# EAGLE board heartSLOG (EAGLE 9.6.2)
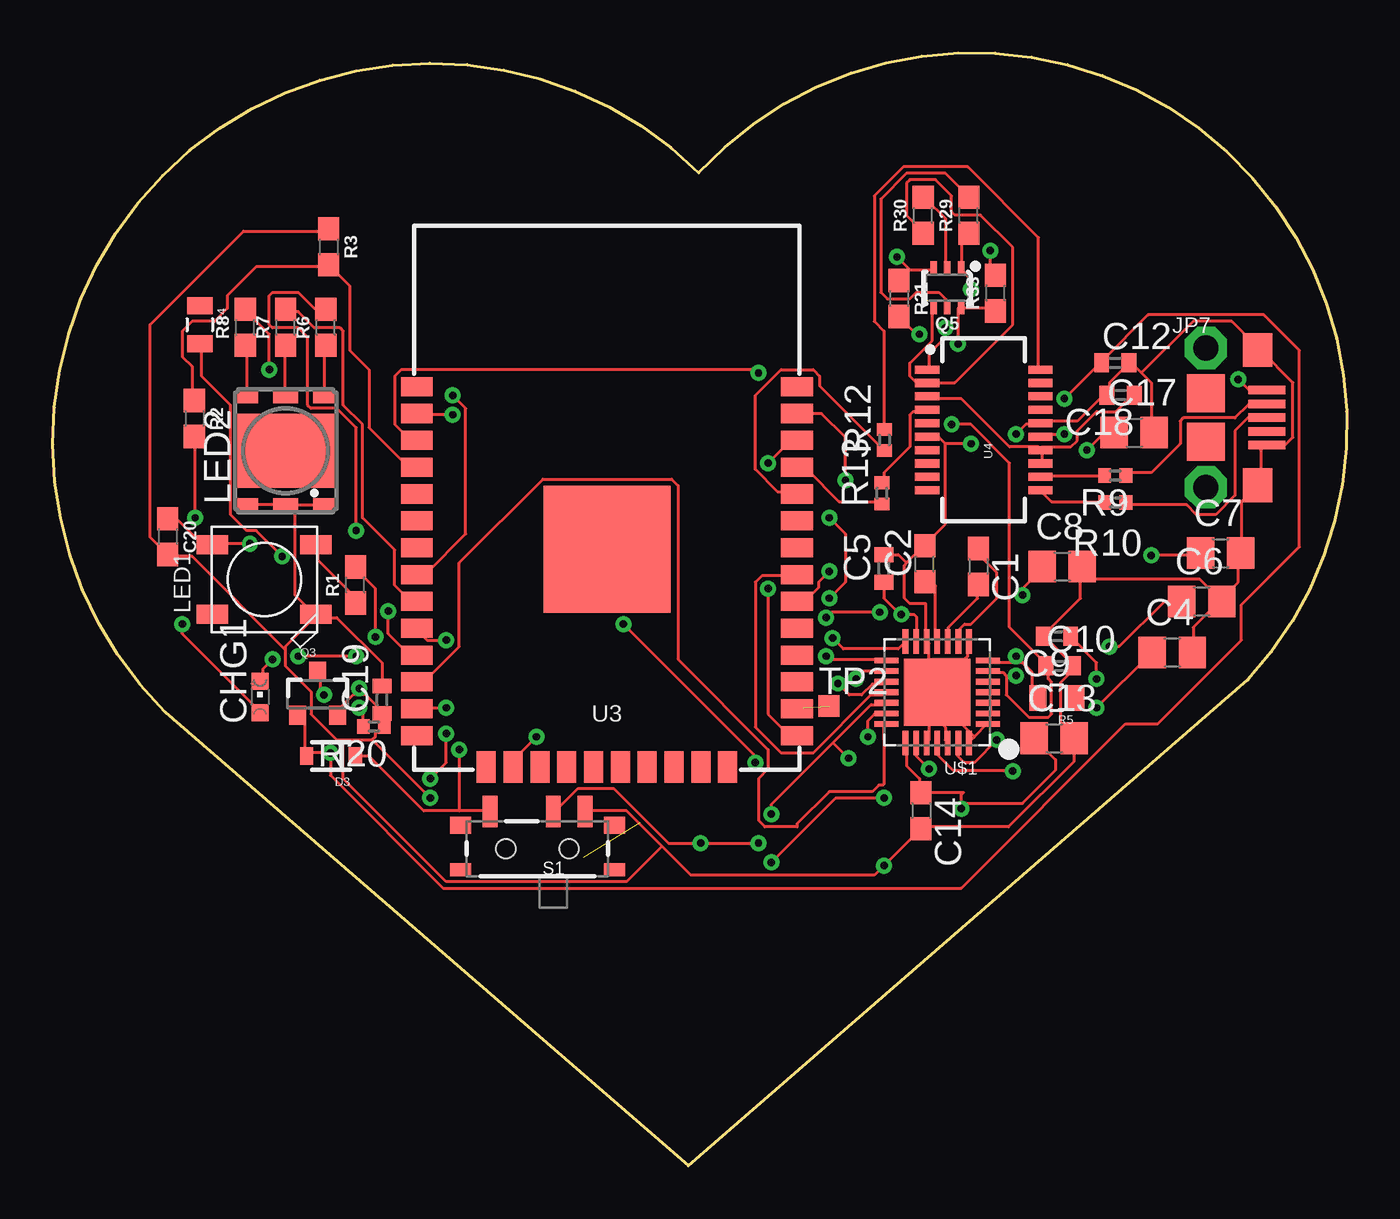
[diagram p0: board, top side]
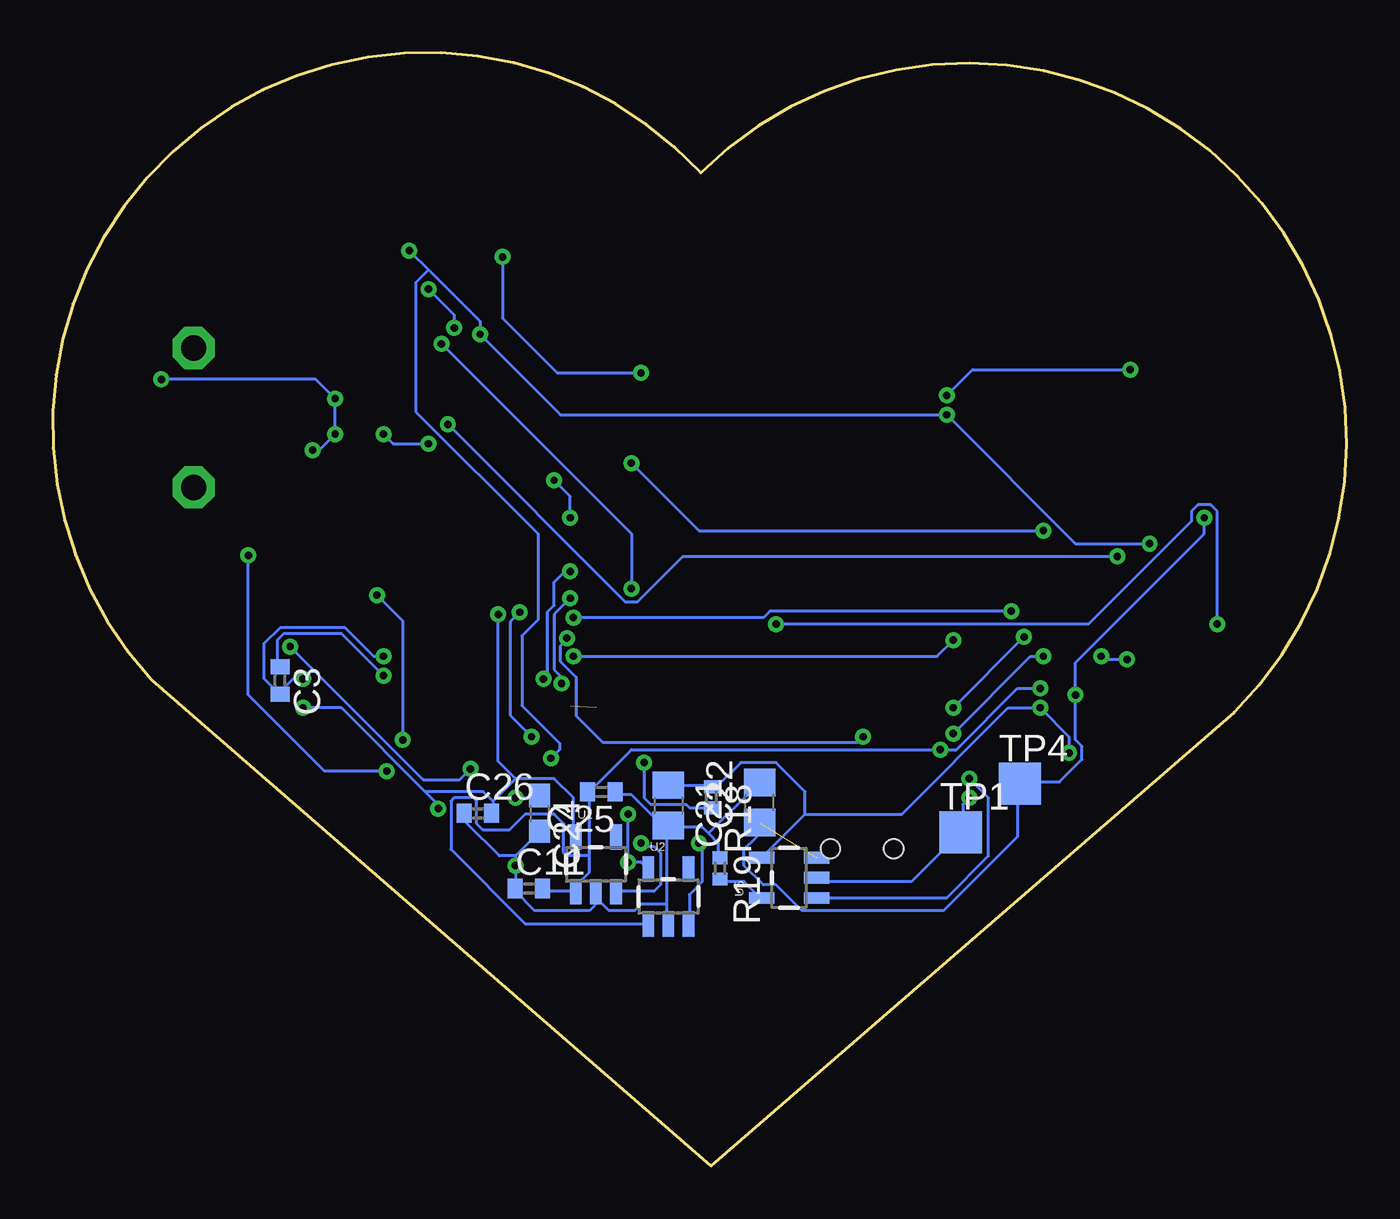
[diagram p1: board, bottom side, seen from below]

Size 61.26 x 52.68 mm. Coordinates in mm from the lower left corner, seen from the top.
Outline: 5.33,21.48 arc-180 30.58,47 arc-180 56.58,23 30.09,0 5.33,21.48
Copper layers (1*16): Top 0.035mm / dielectric 1.5mm / Bottom 0.035mm
Design rules "default": minimum track width 6mil, minimum drill 0.35mm, track to track 6mil, track to pad 6mil, pad to pad 6mil, via to via 6mil, smd to smd 6mil, copper to edge 40mil, drill to drill 6mil, minimum pad ring 10mil, minimum via ring 8mil, stop-mask expansion 4mil, vias tented up to drill 0mil, thermal gap 10mil

## Footprints (pad centres in the part's own frame; a part is rotated, then mirrored left to right if it is on the bottom)
C0603 = smd 1.1 x 1: 1 -0.85,0; 2 0.85,0
C0402 = smd 0.7 x 0.9: 1 -0.65,0; 2 0.65,0
C0805 = smd 1.3 x 1.5: 1 -0.95,0; 2 0.95,0
0603 = smd 1.1 x 1: 1 -0.85,0; 2 0.85,0
CHIPLED_0603 = smd 0.8 x 0.8: A 0,-0.75; C 0,0.75
SOD-323 = smd 0.63 x 0.83: A 1.15,0; C -1.15,0
MICRO-B = smd 0.4 x 1.75: 1 -1.25,2.975; 2 -0.6,2.975; 3 0.05,2.975; 4 0.7,2.975; 5 1.35,2.975 | smd 1.8 x 1.8: P$1 -1.1,0.1; P$2 1.2,0.1 | drill 1.2 pad 2 octagon: P$3 -3.25,0.1; P$4 3.35,0.1 | smd 1.6 x 1.4: P$5 -3.15,2.55; P$6 3.25,2.55
WS2812B = smd 1.5 x 0.9: 1-VDD 2.45,-1.65; 2-DOUT 2.45,1.65; 3-GND -2.45,1.65; 4-DIN -2.45,-1.65
F50360 = smd 0.6 x 1.05: BA 2.55,1.825; BC -2.55,1.825; RA 2.55,-1.825; RC -2.55,-1.825 | smd 0.6 x 1.2: GA 2.55,0; GC -2.55,0 | smd 3.5 x 4.7: NC 0,0
SOT23-3 = smd 0.8 x 0.9: 1 -0.95,-1; 2 0.95,-1; 3 0,1.1
SC70-6 = smd 0.3 x 0.66: 1 -0.65,-0.92; 2 0,-0.92; 3 0.65,-0.92; 4 0.65,0.92; 5 0,0.92; 6 -0.65,0.92
0805 = smd 0.8 x 1.2: 1 -0.9,0; 2 0.9,0
R0402 = smd 0.6 x 0.7: 1 -0.5,0; 2 0.5,0
SWITCH-SPST-SMD-A = smd 0.7 x 1.5: 1 -2.25,-1.75; 2 -0.75,-1.75; 3 2.25,-1.75 | smd 1 x 0.6: GND1 -3.65,1; GND3 3.65,1 | smd 1 x 0.8: GND2 -3.65,-1.1; GND4 3.65,-1.1 | hole 0.9: -1.5,0; 1.5,0
TP20SQ = smd 2 x 2: TP 0,0
TP10SQ = smd 1 x 1: TP 0,0
SOT23-5 = smd 0.55 x 1.2: 1 -0.95,-1.3; 2 0,-1.3; 3 0.95,-1.3; 4 0.95,1.3; 5 -0.95,1.3
ESP-WROOM-32 = smd 0.9 x 1.5: 1 7.7,9; 2 6.43,9; 3 5.16,9; 4 3.89,9; 5 2.62,9; 6 1.35,9; 7 0.08,9; 8 -1.19,9; 9 -2.46,9; 10 -3.73,9; 11 -5,9; 12 -6.27,9; 13 -7.54,9; 14 -8.81,9; 25 -8.81,-9; 26 -7.54,-9; 27 -6.27,-9; 28 -5,-9; 29 -3.73,-9; 30 -2.46,-9; 31 -1.19,-9; 32 0.08,-9; 33 1.35,-9; 34 2.62,-9; 35 3.89,-9; 36 5.16,-9; 37 6.43,-9; 38 7.7,-9 | smd 1.5 x 0.9: 15 -10.3,5.715; 16 -10.3,4.445; 17 -10.3,3.175; 18 -10.3,1.905; 19 -10.3,0.635; 20 -10.3,-0.635; 21 -10.3,-1.905; 22 -10.3,-3.175; 23 -10.3,-4.445; 24 -10.3,-5.715 | smd 6 x 6: GND 0,0
SSOP20_L = smd 0.381 x 1.143: 1 -2.857,-2.68; 2 -2.223,-2.68; 3 -1.587,-2.68; 4 -0.953,-2.68; 5 -0.318,-2.68; 6 0.318,-2.68; 7 0.953,-2.68; 8 1.587,-2.68; 9 2.223,-2.68; 10 2.857,-2.68; 11 2.857,2.68; 12 2.223,2.68; 13 1.587,2.68; 14 0.953,2.68; 15 0.318,2.68; 16 -0.318,2.68; 17 -0.953,2.68; 18 -1.587,2.68; 19 -2.223,2.68; 20 -2.857,2.68
QFN-28 = smd 1.15 x 0.27: 1 -2.4,1.5; 2 -2.4,1; 3 -2.4,0.5; 4 -2.4,0; 5 -2.4,-0.5; 6 -2.4,-1; 7 -2.4,-1.5; 15 2.4,-1.5; 16 2.4,-1; 17 2.4,-0.5; 18 2.4,0; 19 2.4,0.5; 20 2.4,1; 21 2.4,1.5 | smd 0.27 x 1.15: 8 -1.5,-2.4; 9 -1,-2.4; 10 -0.5,-2.4; 11 0,-2.4; 12 0.5,-2.4; 13 1,-2.4; 14 1.5,-2.4; 22 1.5,2.4; 23 1,2.4; 24 0.5,2.4; 25 0,2.4; 26 -0.5,2.4; 27 -1,2.4; 28 -1.5,2.4 | smd 3.15 x 3.15: THERMAL 0,0

## Placement (x,y rotation side)
C1  1uF  [C0603]  43.82,28.37 270 top
C2  1nF  [C0603]  41.28,28.49 90 top
C3  1000pF  [C0402]  50.5,22.97 270 bottom
C4  10uF  [C0805]  53,24.3 0 top
C5  1uF  [C0402]  39.34,28.28 90 top
C6  10uF  [C0805]  54.4,26.72 0 top
C7  10uF  [C0805]  55.28,29 0 top
C8  1uF  [C0805]  47.79,28.37 0 top
C9  10pF  [C0402]  47.54,25.07 180 top
C10  10pF  [C0402]  47.66,23.67 0 top
C11  1u  [C0402]  38.72,13.13 0 bottom
C12  0.1uF  [C0402]  50.3,38 0 top
C13  1uF  [C0805]  47.41,20.24 0 top
C14  10uF  [C0603]  41.11,16.81 270 top
C17  10uF  [C0805]  51.19,34.7 0 top
C18  0.1uF  [C0402]  50.55,36.48 180 top
C19  1.0uF  [C0402]  15.58,22.06 90 top
C20  0.1uF  [0603]  5.44,29.78 270 top
C21  4.7u  [C0805]  32.11,17.07 270 bottom
C22  4.7u  [C0805]  27.8,17.19 90 bottom
C24  2.2uF  [C0603]  38.21,16.68 270 bottom
C25  1u  [C0402]  35.29,17.7 180 bottom
C26  1u  [C0402]  41.13,16.68 0 bottom
CHG1  RED  [CHIPLED_0603]  9.81,22.19 0 top
D3  BAT20J  [SOD-323]  13.17,19.4 180 top
JP7  MICRO-B  [MICRO-B]  54.49,35.46 270 top
LED1  WS2812B5050  [WS2812B]  10.01,27.75 180 top
LED2  F50360  [F50360]  11.03,33.84 90 top
Q3  2.5A/30V  [SOT23-3]  12.53,22.32 0 top
Q5  MBT3904DW1T1  [SC70-6]  42.35,41.56 180 top
R1  10k  [0603]  14.33,27.49 90 top
R2  10k  [0603]  6.71,35.37 270 top
R3  10k  [0603]  13.06,43.5 270 top
R4  49.9K  [0805]  6.96,39.81 270 top
R5  49.9K  [0805]  47.54,22.15 180 top
R6  560  [0603]  12.93,39.69 90 top
R7  560  [0603]  11.03,39.69 90 top
R8  560  [0603]  9.12,39.69 90 top
R9  27  [R0402]  50.3,32.67 180 top
R10  27  [R0402]  50.3,31.4 180 top
R12  1K  [R0402]  39.38,34.35 90 top
R13  1K  [R0402]  39.25,31.83 90 top
R18  330R  [R0402]  30.08,17.45 270 bottom
R19  1k  [R0402]  29.67,14.08 270 bottom
R20  10K  [R0402]  15.2,20.8 180 top
R21  10k  [0603]  40.06,41.05 270 top
R29  10k  [0603]  43.36,44.99 90 top
R30  10k  [0603]  41.2,44.99 90 top
R33  10k  [0603]  44.63,41.31 90 top
S1  PCM12SMTR  [SWITCH-SPST-SMD-A]  22.95,15.02 180 top
TP1  TPSQTP20SQ  [TP20SQ]  18.27,15.8 0 bottom
TP2  PTR1TP10SQ  [TP10SQ]  36.74,21.76 0 top
TP4  TPSQTP20SQ  [TP20SQ]  15.48,18.08 0 bottom
U1  AP2112K-1.8V  [SOT23-5]  35.54,14.27 0 bottom
U2  AP2112K-3.3V  [SOT23-5]  32.11,12.75 0 bottom
U3  ESP-WROOM-32  [ESP-WROOM-32]  26.23,29.18 90 top
U4  FTS31XS-U  [SSOP20_L]  44.08,34.83 270 top
U5  MCP73831  [SOT23-5]  26.4,13.64 90 bottom
U$1  MAX30003CTI+  [QFN-28]  41.87,22.41 180 top

## Library data of the parts
C1-C14 C17-C19 C21 C22 C24-C26 = rcl; SPICEPREFIX: C
C20 = SparkFun-Capacitors; PROD_ID: CAP-00810
CHG1 LED2 = led
D3 = SparkFun-DiscreteSemi; PROD_ID: DIO-11623
JP7 U$1 = circuitects
LED1 = adafruit
Q3 = SparkFun-DiscreteSemi; PROD_ID: TRANS-11308
Q5 = esp32-thing-temp; PROD_ID: TRANS-13337
R1-R3 R6-R8 R21 R29 R30 R33 = SparkFun-Resistors; PROD_ID: RES-00824
R4 R5 U5 = SparkFun
R9 R10 R12 R13 R18-R20 = rcl; SPICEPREFIX: R
S1 = SparkFun-Electromechanical; PROD_ID: SWCH-10651
TP1 TP2 TP4 = testpad
U1 U2 = SparkFun-PowerIC; PROD_ID: VREG-12457
U3 = esp32; SPICEPREFIX: X
U4 = SparkFun-DigitalIC; PROD_ID: IC-11524

## Nets
0: Q5.6 R33.1 U3.25
1.8V: C4.1 C5.1 C13.1 C14.1 C26.2 U1.5 U$1.13 U$1.22
3.3V: C20.1 C24.1 LED1.1-VDD R21.2 R33.2 U2.5 U3.2 U$1.19
3.3V_F: C18.1 U4.3 U4.13 U4.14
5: U3.29
BAT_MON: R2.1 R3.2 U3.4
CHIP_PU: Q5.3 R21.1 U3.3
CSB: U3.10 U$1.15
D+: JP7.3 R10.1
D-: JP7.2 R9.1
DTR: Q5.1 R29.1 U4.1
ECG_N: R5.1
ECG_P: R4.1
ECGN: C3.2 C9.1 R5.2 U$1.7
ECGP: C3.1 C10.1 R4.2 U$1.6
EN: S1.2 U1.3 U2.3
FCLK: U3.16 U$1.14
GND: C2.2 C4.2 C5.2 C6.2 C7.2 C8.2 C9.2 C10.2 C11.1 C12.2 C13.2 C14.2 C17.2 C18.2 C19.2 C20.2 C21.2 C22.2 C24.2 C25.1 C26.1 JP7.5 JP7.P$5 JP7.P$6 LED1.3-GND LED2.BC LED2.GC LED2.RC R3.1 R19.1 R20.1 S1.1 TP1.TP U1.2 U2.2 U4.6 U4.16 U5.2 U$1.1 U$1.2 U$1.3 U$1.4 U$1.5 U$1.8 U$1.12 U$1.24 U$1.26 U$1.28 U$1.THERMAL
INT2B: U3.11 U$1.20
INTB: U3.12 U$1.21
MISO: U3.31 U$1.18
MOSI: U3.37 U$1.17
N$1: LED1.4-DIN R1.1
N$2: C6.1 U$1.23
N$3: C1.1 U$1.9
N$4: TP2.TP U3.26
N$5: CHG1.C U5.1
N$6: C1.2 U$1.10
N$7: C2.1 U$1.11
N$9: R9.2 U4.12
N$10: LED2.RA R6.1
N$11: R10.2 U4.11
N$12: R7.2 U3.9
N$13: C7.1 U$1.25
N$14: C8.1 U$1.27
N$15: LED2.BA R8.1
N$16: CHG1.A R18.2
N$17: LED2.GA R7.1
N$19: R19.2 U5.5
N$20: R8.2 U3.8
N$22: R6.2 U3.36
N$23: Q5.5 R29.2
N$24: Q5.2 R30.2
RTS: Q5.4 R30.1 U4.2
RXD: R13.2 U4.4
SCLK: U3.30 U$1.16
TXD: R12.2 U4.20
U0RXD: R12.1 U3.34
U0TXD: R13.1 U3.35
VBAT: C22.1 Q3.3 R2.2 TP4.TP U5.3
VIN: C11.2 C19.1 C25.2 D3.C Q3.2 S1.3 U1.1 U2.1
VUSB: C12.1 C17.1 C21.1 D3.A JP7.1 Q3.1 R18.1 R20.2 U4.15 U5.4
WS2812/GPIO14: R1.2 U3.13

## Tracks (layer width: path | path; a pad name or v marks a point on that pad's centre or on a via)
0  (via drill 0.35)
  Top 0.152: R33.1 44.54,40.58 43.01,40.58 Q5.6 42.86,40.58 v42.86,38.9 | v33.87,27.32 33.87,21.38 34.78,20.46 35.09,20.46 U3.25
  Bottom 0.152: v33.87,27.32 33.87,29.91 v42.86,38.9
1.8V  (via drill 0.35)
  Top 0.152: 41.03,18.18 41.03,18.33 40.42,18.94 40.42,20 U$1.22 | 41.03,18.18 41.03,17.72 C14.1 | C13.1 47.48,19.22 47.48,18.73 45.91,17.16 43.01,17.16 v43.01,16.91 43.01,17.57 43.11,17.67 C14.1 | 41.03,18.18 C14.1 | U$1.13 40.88,24.88 40.88,26 40.78,26.1 v40.17,26.1 40.11,26.1 39.34,26.87 C5.1 | v49.41,21.68 52,24.27 C4.1
  Bottom 0.152: 40.42,17.26 40.42,16.8 C26.2 | 39.35,18.33 40.42,17.26 | 39.35,18.33 37.53,18.33 36.61,17.41 36.61,15.58 U1.5 | v49.41,21.68 47.58,21.68 43.62,17.72 | 43.62,17.72 42.91,17.01 v43.01,16.91 | 43.62,17.72 40.88,17.72 40.42,17.26 | v40.17,26.1 40.17,19.14 39.35,18.33
3.3V  (via drill 0.35)
  Top 0.152: v39.35,17.41 37.07,17.41 v34.02,14.36 | 36.94,20.03 34.02,17.11 v34.02,16.65 | 36.94,20.03 38.74,21.83 39.35,21.83 U$1.19 | C20.1 5.52,30.52 5.98,30.52 7.05,29.45 7.5,29.45 LED1.1-VDD 7.66,29.45 v9.33,29.45 | v41.03,39.36 40.88,39.36 40.12,40.12 R21.2 | v44.38,43.32 44.38,42.41 44.54,42.25 R33.2 | v18.93,35.55 17.26,35.55 U3.2 | v37.68,19.29 36.94,20.03
  Bottom 0.152: v39.35,17.41 38.29,17.41 C24.1 | U2.5 33.11,14.06 33.41,14.36 v34.02,14.36 v34.02,16.65 | v44.38,43.32 43.47,42.41 | 43.47,42.41 41.03,39.97 v41.03,39.36 37.22,35.55 v18.93,35.55 12.84,29.45 v9.33,29.45 | 43.47,42.41 44.08,41.8 44.08,35.7 38.29,29.91 38.29,25.85 39.05,25.08 39.05,21.78 37.27,20 37.27,19.7 v37.68,19.29
3.3V_F
  Top 0.152: C18.1 51.09,36.46 50.33,35.7 49.41,35.7 48.5,34.79 48.5,34.33 48.19,34.02 46.82,34.02 U4.14 | U4.13 46.82,33.26 46.82,33.87 U4.14 | U4.3 41.49,36.31 43.01,36.31 45.3,34.02 46.67,34.02 U4.14
BAT_MON
  Top 0.152: R2.1 6.59,36.31 6.59,37.84 6.13,38.29 6.13,39.51 6.59,39.97 7.66,39.97 8.26,40.58 8.26,41.19 9.64,42.56 12.99,42.56 R3.2 13.14,42.56 14.06,41.65 14.06,38.6 14.97,37.68 14.97,34.94 16.8,33.11 17.1,33.11 U3.4
CHIP_PU  (via drill 0.35)
  Top 0.152: 40.57,42.41 41.64,42.41 Q5.3 | 40.57,42.41 40.12,41.95 R21.1 | v33.41,37.53 33.26,37.68 16.49,37.68 16.19,37.38 16.19,35.09 16.8,34.48 17.1,34.48 U3.3 | 40.57,42.41 v39.96,43.02
  Bottom 0.152: v33.41,37.53 37.37,37.53 39.96,40.12 v39.96,43.02
CSB  (via drill 0.35)
  Top 0.152: v36.61,24.12 36.76,23.97 39.35,23.97 U$1.15 | v18.63,24.88 17.71,24.88 17.26,25.34 U3.10
  Bottom 0.152: v36.61,24.12 19.39,24.12 v18.63,24.88
D+
  Top 0.152: R10.1 50.94,31.28 53.68,31.28 54.14,30.82 55.05,30.82 55.97,31.74 55.97,34.79 56.58,35.4 57.34,35.4 JP7.3
D-
  Top 0.152: R9.1 50.94,32.81 52,32.81 53.38,34.18 53.38,35.24 53.53,35.4 55.97,35.4 56.58,36.01 57.34,36.01 JP7.2
DTR  (via drill 0.35)
  Top 0.152: R29.1 43.32,44.08 43.01,43.78 43.01,42.56 Q5.1 43.01,42.41 43.47,41.95 v43.47,41.49 | v42.25,39.66 42.25,39.21 41.49,38.44 41.49,37.84 U4.1
  Bottom 0.152: v42.25,39.66 42.25,40.27 v43.47,41.49
ECGN  (via drill 0.35)
  Top 0.152: 45.6,23.81 45.91,23.81 46.36,23.36 46.36,22.44 46.52,22.29 R5.2 | 45.6,23.81 44.38,23.81 U$1.7 | v49.41,23.05 49.41,23.81 48.19,25.03 C9.1 | v45.6,24.12 45.6,23.81
  Bottom 0.152: v49.41,23.05 49.87,23.05 50.48,22.44 C3.2 50.63,22.44 51.24,23.05 51.24,24.73 50.48,25.49 47.43,25.49 46.06,24.12 v45.6,24.12
ECGP  (via drill 0.35)
  Top 0.152: 45.15,23.2 45.15,22.29 46.21,21.22 47.13,21.22 47.28,21.38 47.28,22.9 47.13,23.05 47.13,23.66 C10.1 46.97,23.81 45.3,25.49 45.3,33.26 43.47,35.09 v42.55,35.09 | 45.15,23.2 44.99,23.36 44.38,23.36 U$1.6 | 45.15,23.2 v45.6,23.2 | v10.86,28.84 9.64,30.06 9.18,30.06 8.42,30.82 8.42,36.01 7.05,37.38 7.05,38.9 R4.2
  Bottom 0.152: v45.6,23.2 47.58,25.19 50.33,25.19 50.63,24.88 50.63,23.66 C3.1 | v10.86,28.84 31.43,28.84 33.56,26.71 34.17,26.71 v42.55,35.09
EN  (via drill 0.35)
  Top 0.152: S1.2 23.81,16.8 24.88,17.87 26.55,17.87 29.14,15.28 v30.67,15.28 v33.41,15.28
  Bottom 0.152: v30.67,15.28 30.52,15.13 30.52,13.45 31.12,12.84 31.12,11.47 U2.3 | v33.41,15.28 33.26,15.13 32.8,15.13 32.5,14.82 32.5,13.3 32.8,12.99 34.48,12.99 U1.3
FCLK  (via drill 0.35)
  Top 0.152: U$1.14 40.03,24.47 37.42,24.47 v36.92,24.98 | v22.9,20.31 21.83,19.24 21.83,18.94 U3.16
  Bottom 0.152: v22.9,20.31 23.15,20.05 35.24,20.05 36.48,21.3 36.48,23.13 37.22,23.87 37.22,24.62 36.92,24.93 v36.92,24.98
GND  (via drill 0.35)
  Top 0.152: LED2.BC 9.33,31.28 11.01,31.28 LED2.GC | 11.47,31.28 11.16,31.28 LED2.GC | 11.47,31.28 12.84,31.28 LED2.RC | 15.12,20.16 15.28,20.31 15.28,20.46 15.58,20.77 R20.1 | 13.75,20.16 13.45,20.16 12.23,21.38 12.23,22.44 11.01,23.66 11.01,24.42 | 13.75,20.16 15.12,20.16 | 11.01,24.42 11.01,24.58 12.38,25.95 LED1.3-GND | C19.2 15.58,22.75 15.58,23.81 13.45,25.95 12.53,25.95 LED1.3-GND | 11.01,24.42 6.59,28.84 5.52,28.84 C20.2 5.37,29 4.61,29.76 4.61,39.82 9.03,44.24 12.99,44.24 R3.1 | 11.47,31.28 11.47,27.01 12.38,26.1 LED1.3-GND | 11.47,31.28 LED2.GC | 15.12,20.16 v17.87,17.41 | 40.42,28.54 41.18,29.3 C2.2 41.34,29.45 42.25,30.37 42.25,34.18 | 40.42,28.54 40.32,28.44 40.32,26.86 40.57,26.61 41.34,26.61 41.34,26 41.34,25.85 41.34,24.88 U$1.12 41.49,24.73 41.49,23.97 | 42.25,34.18 41.95,34.48 41.49,34.48 U4.6 | U$1.5 44.38,22.9 44.38,22.44 U$1.4 44.38,22.29 44.38,21.98 U$1.3 44.38,21.83 44.38,21.53 U$1.2 44.38,21.38 44.38,20.92 U$1.1 44.23,20.92 43.62,20.31 | 43.62,20.31 43.47,20.16 U$1.28 | 41.49,20.92 41.49,21.98 41.79,22.29 U$1.THERMAL | 41.49,20.92 41.49,20.16 U$1.24 | 41.49,23.97 41.49,22.75 41.79,22.44 U$1.THERMAL | 42.1,20.92 42.25,20.77 42.25,20.16 U$1.26 | 41.49,20.92 42.1,20.92 | 41.49,20.92 U$1.THERMAL | 41.49,23.97 43.16,23.97 43.32,24.12 43.32,24.73 U$1.8 | 41.49,23.97 U$1.THERMAL | 43.62,20.31 43.01,20.92 42.1,20.92 | 42.1,20.92 U$1.THERMAL | 51.55,37.53 51.09,37.99 C12.2 50.94,37.99 50.02,37.07 50.02,36.62 C18.2 49.87,36.62 48.5,35.24 46.82,35.24 U4.16 46.67,35.09 46.06,35.09 v45.6,34.63 | 51.55,37.53 52,37.07 52,34.79 C17.2 | C4.2 53.98,24.42 53.98,25.49 55.2,26.71 C6.2
  Top 0.152: C6.2 55.36,26.86 56.12,27.62 56.12,29 C7.2 56.27,29.15 56.27,31.43 57.03,32.2 JP7.P$6 57.19,32.35 57.19,33.87 57.34,34.02 JP7.5 57.49,34.18 58.4,34.18 58.71,34.48 58.71,37.07 57.19,38.6 JP7.P$5 57.03,38.75 55.81,39.97 53.98,39.97 51.55,37.53 | v43.47,34.18 42.25,34.18 | 48.65,27.78 48.65,26.86 46.97,25.19 C9.2 46.97,25.03 48.19,23.81 C10.2 48.19,23.66 48.19,23.36 47.74,22.9 47.74,20.92 48.35,20.31 C13.2 48.36,19.16 45.25,16.04 41.18,16.04 C14.2 41.03,15.89 v39.35,14.21 38.9,13.76 30.21,13.76 28.84,15.13 | 48.65,27.78 48.65,28.23 C8.2 48.65,27.78 | 28.84,15.13 27.16,16.8 25.33,16.8 S1.1 | 48.65,27.78 54.29,27.78 55.2,26.86 C6.2 | 13.75,20.16 13.75,18.33 18.63,13.45 27.16,13.45 28.84,15.13 | C5.2 40.03,28.93 40.42,28.54
  Bottom 0.152: U5.2 25.18,13.6 25.03,13.45 20.61,13.45 18.32,15.74 TP1.TP 18.17,15.89 18.17,17.11 v17.87,17.41 | v43.47,34.18 45.15,34.18 v45.6,34.63 | 39.35,14.67 v39.35,14.21 39.35,13.15 C11.1 39.35,12.99 38.44,12.08 35.85,12.08 35.39,12.54 | 39.35,14.67 38.29,15.74 C24.2 | 39.35,14.67 40.12,14.67 41.64,16.19 41.64,16.65 C26.1 | 30.21,15.74 30.52,16.04 32.04,16.04 C21.2 | 30.21,15.74 29.75,15.28 29.75,14.67 R19.1 | C25.1 34.63,17.57 33.87,17.57 32.5,16.19 32.19,16.19 C21.2 | 32.19,12.38 32.19,16.04 C21.2 | 32.19,12.38 32.19,11.47 U2.2 | 35.39,12.54 35.39,12.84 U1.2 35.39,12.54 | 35.39,12.54 34.93,12.08 33.72,12.08 33.41,12.38 32.19,12.38 | 30.21,15.74 27.92,18.02 C22.2
  pour Top: 129.29,44.12 arc-45 129.47,44.04
INT2B  (via drill 0.35)
  Top 0.152: v38.59,20.31 38.59,21.07 38.9,21.38 39.35,21.38 U$1.20 | v39.15,26.2 36.87,26.2 v36.61,25.95 | v15.88,26.25 15.88,25.19 16.8,24.27 17.1,24.27 U3.11
  Bottom 0.152: v39.15,26.2 39.61,25.74 39.61,23.56 39.61,21.33 v38.59,20.31 | v36.61,25.95 27.62,25.95 27.31,26.25 v15.88,26.25
INTB
  Top 0.152: U$1.21 39.35,20.92 39.35,20.26 39.35,20.16 39.35,18.07 39.3,18.02 39.1,18.02 38.8,17.72 36.76,17.72 35.24,16.19 35.24,16.04 33.72,16.04 33.41,16.35 33.41,18.33 33.87,18.79 33.87,19.7 29.6,23.97 29.6,32.2 29.3,32.5 23.2,32.5 19.24,28.54 19.24,24.58 17.71,23.05 17.26,23.05 U3.12
MISO
  Top 0.152: U$1.18 39.35,22.29 38.74,22.29 36,19.55 34.48,19.55 33.26,20.77 33.26,27.62 33.56,27.93 35.09,27.93 U3.31
MOSI  (via drill 0.35)
  Top 0.152: 39.53,22.83 39.46,22.9 U$1.17 39.35,22.8 38.8,22.8 38.29,22.29 37.71,22.29 v37.17,22.83 | v37.53,32.45 37.53,34.48 36.4,35.61 U3.37 | v36.76,30.67 37.53,29.91 37.53,27.62 v36.76,26.86
  Bottom 0.152: v36.76,30.67 36.76,31.69 v37.53,32.45 | v36.76,26.86 37.52,26.1 37.52,23.49 37.17,23.14 v37.17,22.83
N$1
  Top 0.152: R1.1 14.21,26.71 14.21,27.01 12.53,28.69 12.53,29.3 LED1.4-DIN
N$2  (via drill 0.35)
  Top 0.152: v41.49,18.79 40.88,19.39 40.88,20 U$1.23 | v50.02,24.58 50.48,24.58 52.61,26.71 53.38,26.71 C6.1
  Bottom 0.152: v41.49,18.79 42,18.28 43.72,18.28 v50.02,24.58
N$3
  Top 0.152: C1.1 43.93,29.15 43.93,28.84 44.69,28.08 44.69,26.86 43.47,25.64 43.16,25.64 42.86,25.34 42.86,24.88 U$1.9
N$4  (1 unrouted)
  Top 0.152: 35.54,21.68 35.24,21.68 U3.26
N$5  (via drill 0.35)
  Top 0.152: v10.4,23.97 9.94,23.51 9.94,23.05 CHG1.C | v14.36,24.12 v11.62,24.12 | v18.63,20.46 18.63,19.09 v17.87,18.33
  Bottom 0.152: v10.4,23.97 11.47,23.97 v11.62,24.12 | v14.36,24.12 14.97,24.12 v18.63,20.46 | v17.87,18.33 16.95,17.41 16.95,14.67 18.93,12.69 25.03,12.69 U5.1
N$6
  Top 0.152: C1.2 43.77,27.47 43.77,26.86 42.4,25.49 42.4,24.88 U$1.10
N$7
  Top 0.152: C2.1 41.79,27.44 41.79,24.88 U$1.11
N$9
  Top 0.152: R9.2 49.72,32.65 46.82,32.65 U4.12
N$10
  Top 0.152: LED2.RA 12.84,36.46 12.84,38.75 R6.1
N$11
  Top 0.152: R10.2 49.72,31.43 47.28,31.43 46.82,31.89 U4.11
N$12
  Top 0.152: R7.2 11.16,40.43 11.62,40.43 12.38,39.66 13.6,39.66 13.75,39.51 13.75,36.01 14.67,35.09 14.67,30.67 16.19,29.15 16.19,27.47 16.8,26.86 17.1,26.86 U3.9
N$13  (via drill 0.35)
  Top 0.152: C7.1 54.23,28.89 v52,28.89 | U$1.25 41.87,19.47 42.61,18.73 45.4,18.73 v45.45,18.69
  Bottom 0.152: v52,28.89 52,22.29 48.4,18.69 v45.45,18.69
N$14  (via drill 0.35)
  Top 0.152: v44.69,20.16 43.62,19.09 43.16,19.09 42.86,19.39 42.86,20 U$1.27 | v45.91,27.01 45.91,27.32 46.82,28.23 C8.1
  Bottom 0.152: v44.69,20.16 44.69,25.8 v45.91,27.01
N$15
  Top 0.152: LED2.BA 9.18,36.46 9.18,38.75 R8.1
N$16  (via drill 0.35)
  Top 0.152: v33.26,19.09 33.26,19.39 v27.01,25.64 | v6.13,25.64 6.13,25.19 9.79,21.53 CHG1.A
  Bottom 0.152: v33.26,19.09 33.26,17.41 32.95,17.11 31.28,17.11 31.12,16.96 30.21,16.96 R18.2 | v27.01,25.64 12.23,25.64 7.35,30.52 7.35,30.98 7.05,31.28 6.44,31.28 6.13,30.98 v6.13,25.64
N$17
  Top 0.152: R7.1 11.01,38.75 11.01,36.46 LED2.GA
N$19
  Bottom 0.152: R19.2 29.6,13.45 28.53,13.45 27.77,12.69 U5.5
N$20  (via drill 0.35)
  Top 0.152: v10.25,37.68 10.25,39.36 9.18,40.43 R8.2 | v18.93,36.46 19.54,35.85 19.54,29.91 17.71,28.08 17.26,28.08 U3.8
  Bottom 0.152: v10.25,37.68 17.71,37.68 v18.93,36.46
N$22  (via drill 0.35)
  Top 0.152: v14.36,30.06 14.36,34.94 13.45,35.85 12.23,35.85 12.07,36.01 12.07,39.21 11.62,39.66 10.4,39.66 10.25,39.82 10.25,41.19 10.4,41.34 11.62,41.34 12.38,40.58 12.84,40.58 R6.2 | v33.87,33.26 35.09,34.48 U3.36
  Bottom 0.152: v14.36,30.06 30.67,30.06 v33.87,33.26
N$23
  Top 0.152: Q5.5 42.25,40.73 42.25,41.03 41.95,41.34 40.88,41.34 40.57,41.03 39.51,41.03 39.2,41.34 39.2,45.76 40.42,46.98 42.25,46.98 43.32,45.91 R29.2
N$24
  Top 0.152: Q5.2 42.25,42.56 42.25,44.84 41.34,45.76 R30.2
RTS
  Top 0.152: Q5.4 41.64,40.58 41.64,39.05 40.57,37.99 40.57,37.38 40.88,37.07 41.34,37.07 U4.2 41.49,37.07 42.71,37.07 45.45,39.82 45.45,43.47 43.93,45 42.71,45 42.55,45.15 42.55,45.91 41.79,46.67 40.57,46.67 40.42,46.52 40.42,45 41.18,44.24 R30.1
RXD
  Top 0.152: R13.2 39.35,32.35 39.35,32.81 40.57,34.02 40.57,35.55 40.73,35.7 41.34,35.7 U4.4
SCLK  (via drill 0.35)
  Top 0.152: U$1.16 38.4,23.41 v38.03,23.05 | v36.76,28.13 36.26,27.62 36.26,27.37 35.6,26.72 U3.30
  Bottom 0.152: v38.03,23.05 37.83,23.26 37.83,26.23 37.53,26.53 37.53,27.62 37.02,28.13 v36.76,28.13
TXD
  Top 0.152: R12.2 39.35,34.94 39.35,39.51 38.9,39.97 38.9,45.91 40.27,47.28 43.32,47.28 46.67,43.93 46.67,37.84 U4.20
U0RXD
  Top 0.152: R12.1 39.35,33.87 36.31,36.92 36.31,37.38 36,37.68 34.48,37.68 33.26,36.46 33.26,32.96 34.33,31.89 35.09,31.89 U3.34
U0TXD
  Top 0.152: R13.1 39.2,31.43 37.22,31.43 35.7,32.96 35.24,32.96 U3.35
VBAT  (via drill 0.35)  (1 unrouted)
  Top 0.152: v12.84,22.29 12.68,22.44 12.68,23.36 Q3.3 | v6.74,30.67 6.74,34.48 R2.2
  Bottom 0.152: v6.74,30.67 6.74,29.91 12.84,23.81 v12.84,22.29 12.84,20.16 12.53,19.85 12.53,19.24 13.6,18.18 15.43,18.18 TP4.TP 15.58,18.02 15.58,15.58 19.09,12.08 25.79,12.08 27.01,13.3 27.62,13.3 28.53,14.21 28.53,14.98 27.92,15.58 27.92,16.19 C22.1
VIN  (via drill 0.35)
  Top 0.152: 19.24,16.8 20.61,16.8 S1.3 | 19.24,16.8 17.56,16.8 14.97,19.39 14.36,19.39 D3.C | 14.51,22.29 14.82,22.29 15.58,21.53 C19.1 | 14.51,22.29 14.21,22.29 13.6,21.68 13.6,21.38 Q3.2 | v14.51,22.59 14.51,22.29 | v19.24,19.7 19.24,16.8
  Bottom 0.152: 35.85,14.67 35.85,13.91 36.46,13.3 36.46,12.99 U1.1 36.61,12.99 37.98,12.99 C11.2 | 35.85,14.67 35.85,17.57 C25.2 35.85,17.72 33.87,19.7 v19.24,19.7 18.48,19.7 15.58,22.59 v14.51,22.59 | 35.85,14.67 36.92,14.67 37.07,14.82 37.07,16.19 37.53,16.65 38.9,16.65 39.66,15.89 40.88,15.89 41.18,16.19 41.18,17.26 41.34,17.41 42.25,17.41 42.4,17.26 42.4,14.98 38.9,11.47 33.11,11.47 U2.1
VUSB  (via drill 0.35)
  Top 0.152: v47.89,36.31 49.57,37.99 C12.1 49.72,38.14 51.85,40.27 57.34,40.27 59.01,38.6 59.01,29.3 56.27,26.56 56.27,24.88 52.31,20.92 50.78,20.92 43.01,13.15 18.48,13.15 13.14,18.48 v13.14,19.55 12.07,19.55 D3.A 11.92,19.55 11.92,20.92 11.62,21.22 Q3.1 | v47.89,34.63 46.82,34.63 U4.15 | v48.96,33.87 49.72,34.63 50.17,34.63 C17.1 | v56.12,37.23 56.58,36.77 57.34,36.77 JP7.1 | v14.51,21.68 14.67,21.53 14.67,20.92 R20.2
  Bottom 0.152: v48.96,33.87 48.65,33.87 v47.89,34.63 v47.89,36.31 48.8,37.23 v56.12,37.23 | C21.1 32.04,18.02 30.21,18.02 R18.1 30.06,18.02 29.75,18.02 28.69,19.09 27.01,19.09 25.64,17.72 25.64,16.65 | 25.64,16.65 21.07,16.65 16.04,21.68 v14.51,21.68 13.14,20.31 v13.14,19.55 | 25.64,16.65 27.62,14.67 U5.4
WS2812/GPIO14  (via drill 0.35)
  Top 0.152: v15.28,25.03 15.28,27.32 14.36,28.23 R1.2 | v18.63,21.68 17.26,21.68 U3.13
  Bottom 0.152: v18.63,21.68 v15.28,25.03